# Altium PCB M26_M_V3.0.1.PcbDoc
Units mil, origin at the board's own origin, x right, y up, seen from the top; angles counter-clockwise.
Board outline 1968.5 x 1771.65 mil, 2 copper layers (Top Layer, Bottom Layer); 97 components, 84 nets, 345 pads, 100 vias.
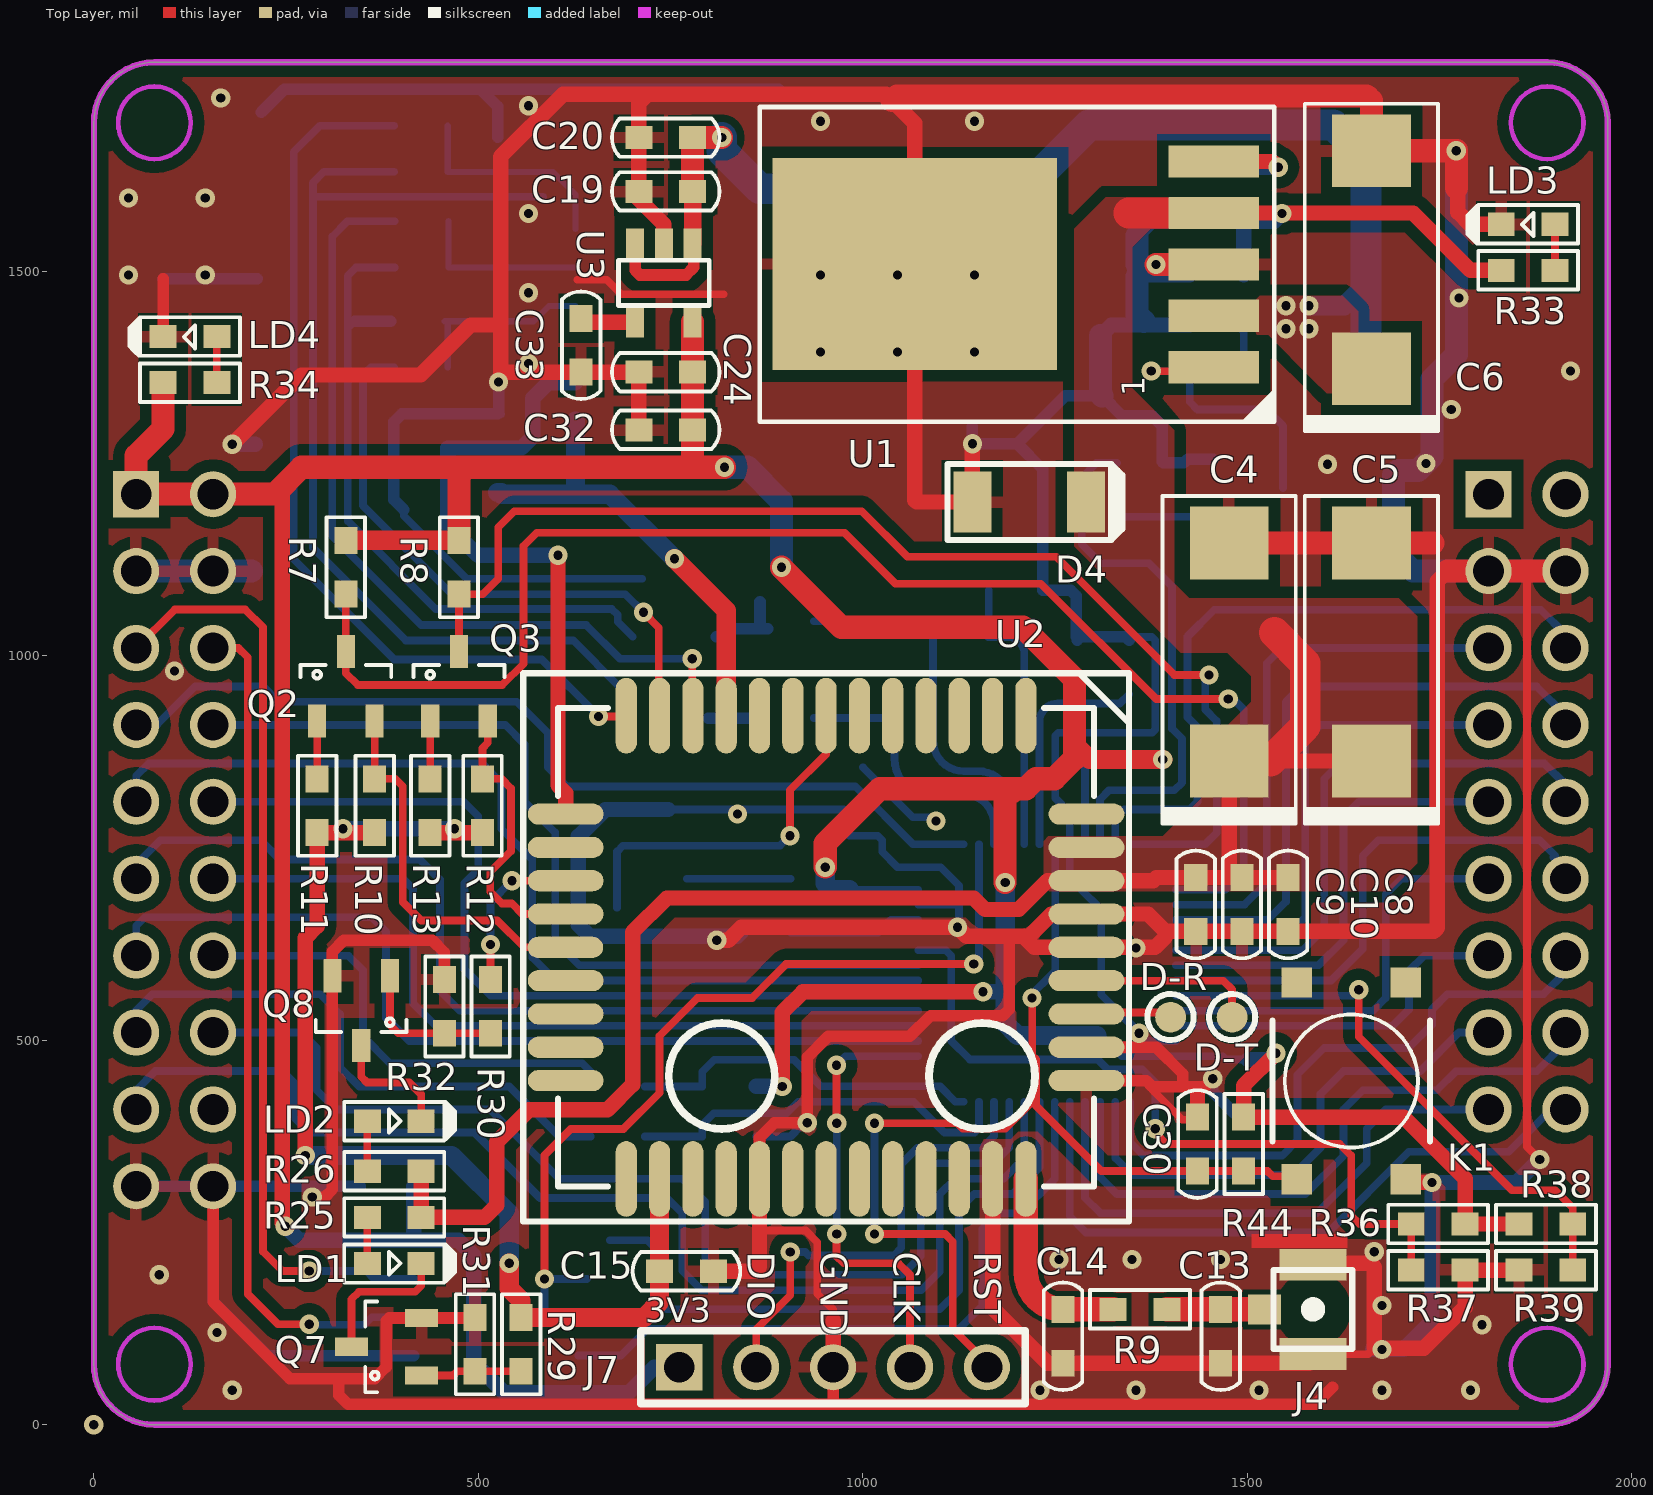
[diagram p0: Top Layer view]
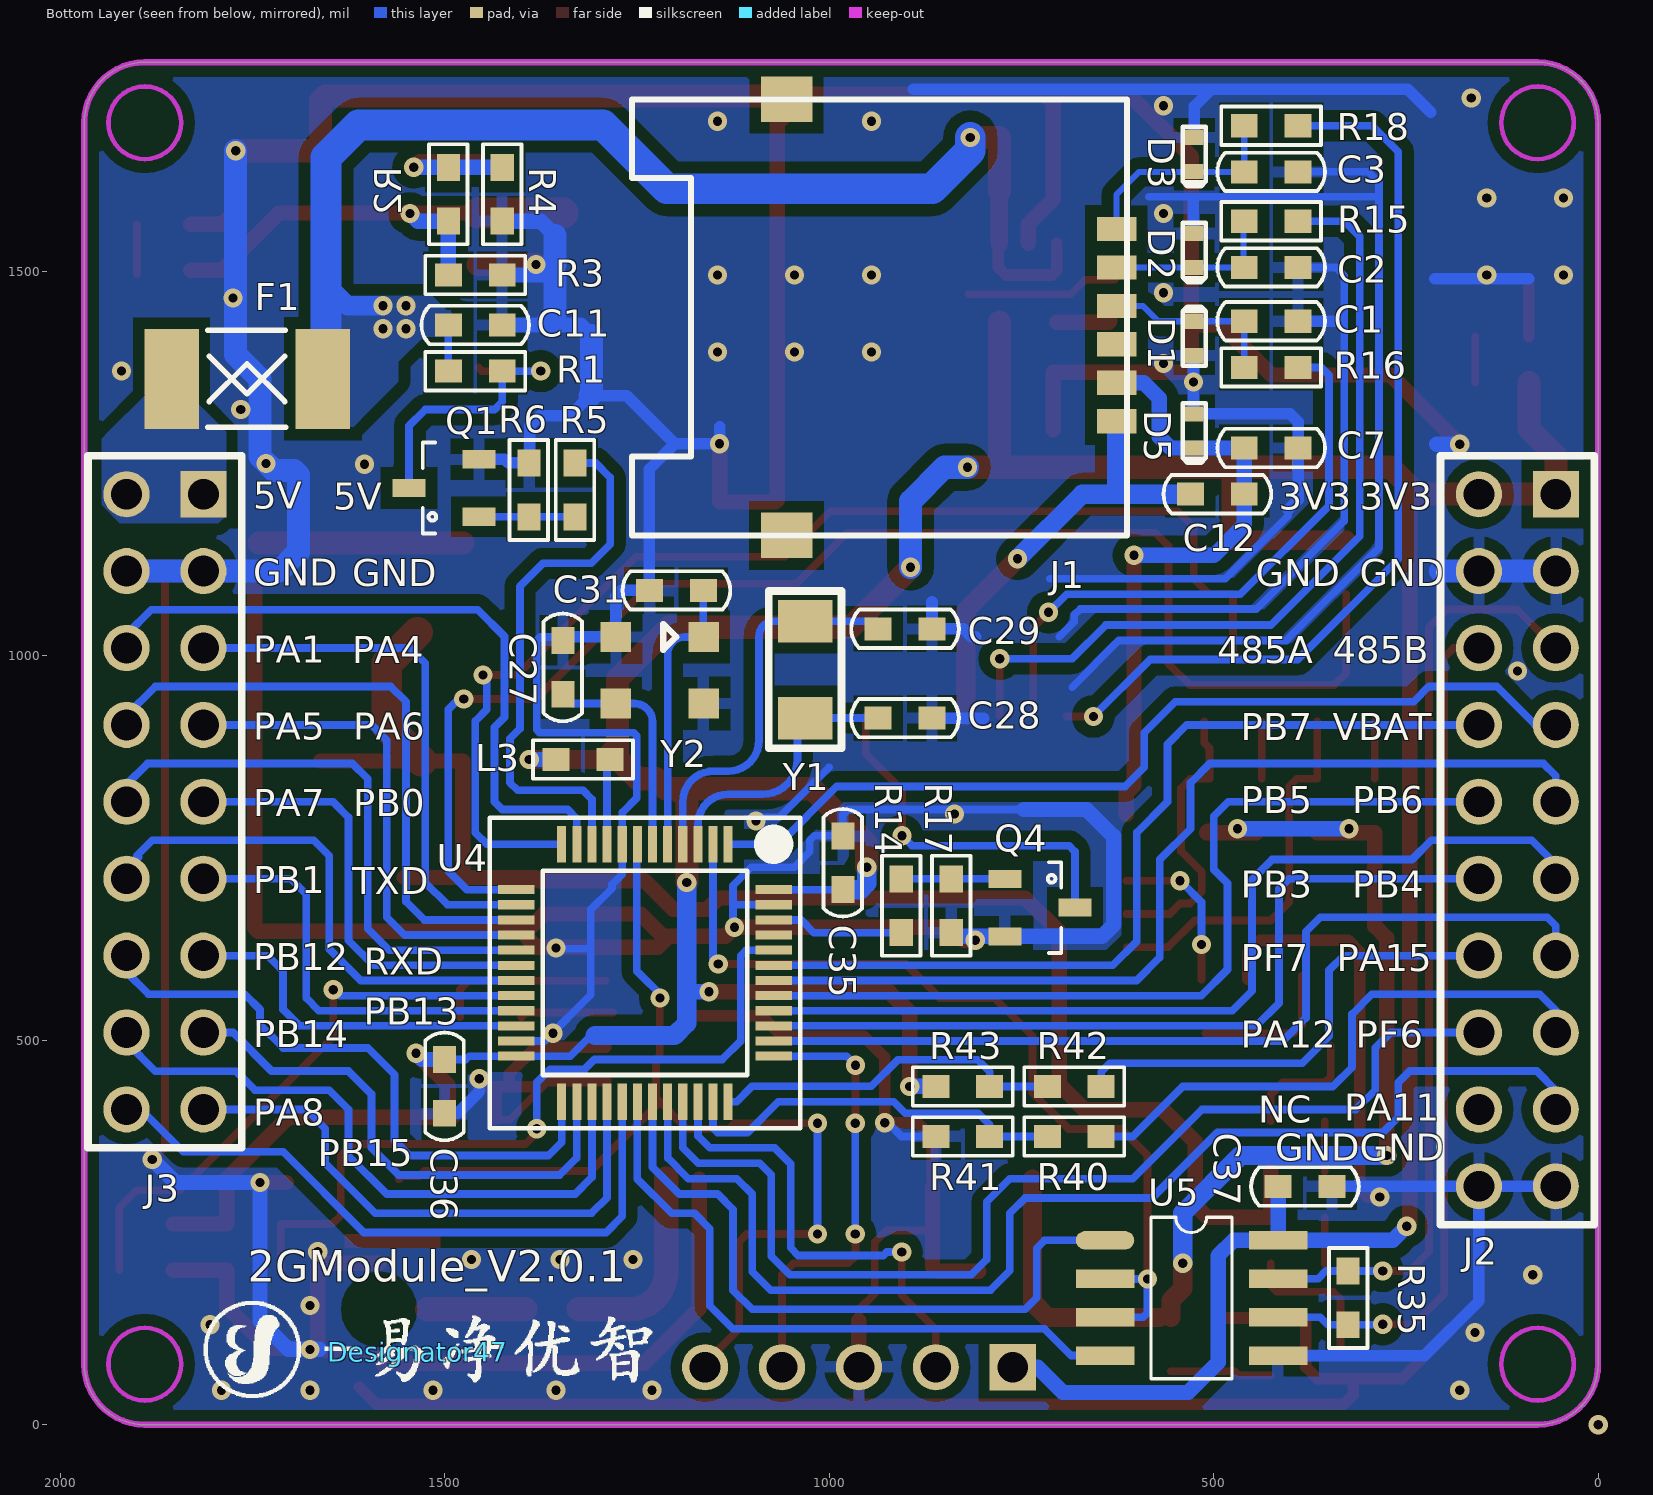
[diagram p1: Bottom Layer view, seen from below]

## Layer stack, top to bottom
Top Layer: signal copper 1.4
Dielectric: dielectric 12.6, FR-4, Dk 4.8
Bottom Layer: signal copper 1.4

## Board outline
0,78.74 ccw(c78.74,78.74) 78.74,0 1889.76,0 ccw(c1889.76,78.74) 1968.5,78.74 1968.5,1692.91 ccw(c1889.76,1692.91) 1889.76,1771.65 78.74,1771.65 ccw(c78.74,1692.91) 0,1692.91

## Design rules (kind name [scope] priority, off if disabled: settings)
Clearance [All] p1: gap=6
ComponentClearance [All] p1: gap=5 collisioncheckmode=0 verticalgap=10
PlaneClearance [All] p1: clearance=5.91
PlaneConnect [All] p1: planeconnectstyle=Relief reliefexpansion=20 reliefentries=4 reliefconductorwidth=20 reliefairgap=10
PolygonConnect [All] p1: connectstyle=Relief reliefconductorwidth=15 reliefentries=4 polygonreliefangle="90 Angle"
RoutingCorners [All] p1: cornerstyle=Round minsetback=393.7 maxsetback=393.7
RoutingVias [All] p1: holewidth=28 width=50 viastyle="Through Hole" minholewidth=12 minwidth=25 maxholewidth=50 maxwidth=50
SolderMaskExpansion [All] p1: expansion=4
TestPointUsage [All] p1: valid=0 allowmultiple=FALSE
Testpoint [All] p1: side=15 testpointundercomponent=TRUE minsize=40 maxsize=100 preferedsize=60 minholesize=0 maxholesize=40 preferedholesize=32 testpointgrid=1 style=1021 order=0-112345678
Width [All] p1: maxlimit=100 minlimit=8 preferedwidth=10 minimp=50.000000 maximp=50.000000 favimp=50.000000
15 further rules are at their usual default settings.

## Classes and differential pairs
component class U_03-2G: C1 C2 C3 C7 C12 C13 C14 C15 D1 D2 D3 D5 D-R D-T J1 J4 LD1 LD2 Q2 Q3 Q4 Q7 Q8 R7 R8 R9 R10 R11 R12 R13 R14 R15 R16 R17 R18 R25 R26 R29 R30 R31 R32 U2
component class U_01-POWER: C4 C5 C6 C8 C9 C10 C11 C19 C20 C24 C32 C33 D4 F1 LD3 LD4 Q1 R1 R2 R3 R4 R5 R6 R33 R34 U1 U3
component class U_02-MCU: C27 C28 C29 C30 C31 C35 C36 C37 J2 J3 J7 K1 L3 R35 R36 R37 R38 R39 R40 R41 R42 R43 R44 U4 U5 Y1 Y2

## Components (designator, comment, footprint, x,y, rotation, side; value= is the part's Value field where it differs from the comment)
C1 "33PF" 0603_C 390.16,1434.84 r0 bottom
C2 "33PF" 0603_C 390.16,1504.84 r0 bottom
C3 "33PF" 0603_C 390.16,1629.05 r0 bottom
C4 "220uF/16V" C_TAN_D 1476.18,1004.84 r90 top
C5 "220uF/16V" C_TAN_D 1661.18,1004.84 r90 top
C6 "220uF/16V" C_TAN_D 1661.18,1514.84 r90 top
C7 "33PF" 0603_C 390.16,1270.05 r0 bottom
C8 "0.1uF" 0603_C 1552.8,641.61 r90 top
C9 "33P" 0603_C 1432.8,641.61 r90 top
C10 "10P" 0603_C 1492.8,641.61 r90 top
C11 "0.1uF" 0603_C 1425,1430 r0 bottom
C12 "0.1uF" 0603_C 460.16,1210.05 r0 bottom
C13 "NC" 0603_C 1465.18,150 r270 top
C14 "NC" 0603_C 1260.18,150 r270 top
C15 "4.7uF" 0603_C 735.59,199.61 r0 top
C19 "1uF" 0603_C 778.58,1603.66 r180 top
C20 "0.1uF" 0603_C 778.58,1673.66 r180 top
C24 "1uF" 0603_C 778.58,1368.66 r180 top
C27 "Cap" 0603_C 1346.18,949.84 r90 bottom
C28 "Cap" 0603_C 936.18,918.86 r180 bottom
C29 "Cap" 0603_C 936.18,1034.84 r180 bottom
C30 "Cap" 0603_C 1435,400 r270 top
C31 "Cap" 0603_C 1163.55,1084.84 r0 bottom
C32 "0.1uF" 0603_C 778.58,1293.66 r180 top
C33 "10nF" 0603_C 633.58,1438.66 r270 top
C35 "Cap" 0603_C 982.13,695.79 r90 bottom
C36 "Cap" 0603_C 1500,475 r270 bottom
C37 "Cap" 0603_C 416.18,309.84 r180 bottom
D1 "ESD9M5.0ST5G" SOD-923 525.16,1434.84 r270 bottom
D2 "ESD9M5.0ST5G" SOD-923 525.16,1504.84 r90 bottom
D3 "ESD9M5.0ST5G" SOD-923 525.16,1629.62 r90 bottom
D4 "BZV55C4V3" SOD-80 1216.18,1199.84 r0 top
D5 "ESD9M5.0ST5G" SOD-923 525.16,1270.05 r90 bottom
D-R "" TP-40 1400,530 r90 top (schematic designator TP2)
D-T "" TP-40 1480,530 r0 top (schematic designator TP1)
Designator47 "Comment" PIC_AIRFACTORY-1500 1535,95 r180 bottom
F1 "Fuse 2A" 1812_F 1855,1360 r180 bottom
J1 "SIM_Card" MicroSIM-6 626.18,1304.84 r90 bottom
J2 "Header2X10" DIP20-2.54-2.54 55,1210 r270 bottom locked
J3 "HEADER2X9" DIP18-2.54-2.54 1813.5,1210 r270 bottom locked
J4 "CON2" RF-Z 1585.18,150 r270 top
J7 "XH2.54-5P" SIP5 761.18,74.84 r0 top
K1 "KEY" KEY_SMD5465 1706,575 r270 top
L3 "Inductor" 0603_R 1355,865 r180 bottom
LD1 "WHITE" LED_0603 355.59,209.61 r0 top
LD2 "WHITE" LED_0603 355.59,394.61 r0 top
LD3 "WHITE" LED_0603 1900,1561 r180 top
LD4 "WHITE" LED_0603 160,1415 r180 top
Q1 "2N3904" SOT23 1455.35,1180.59 r0 bottom
Q2 "BSS138" SOT23 290.32,914.84 r90 top
Q3 "BSS138" SOT23 437.32,914.84 r90 top
Q4 "2N3904" SOT23 771.18,709.84 r180 bottom
Q7 "2N3904" SOT23 425.83,64.01 r180 top
Q8 "2N3904" SOT23 385,583.82 r270 top
R1 "47K" 0603_R 1495,1370 r180 bottom
R2 "124K" 0603_R 1495,1635 r270 bottom
R3 "750R" 0603_R 1425,1495 r0 bottom
R4 "56K" 0603_R 1425,1635 r270 bottom
R5 "4.7K" 0603_R 1330.35,1250.59 r270 bottom
R6 "47K" 0603_R 1390.35,1180.59 r90 bottom
R7 "10K" 0603_R 327.72,1150 r270 top
R8 "10K" 0603_R 474.72,1150 r270 top
R9 "0R" 0603_r 1325.18,150 r0 top
R10 "10K" 0603_R 365.12,769.84 r90 top
R11 "10K" 0603_R 290.32,769.84 r90 top
R12 "10K" 0603_R 505.32,769.84 r90 top
R13 "10K" 0603_R 437.32,769.84 r90 top
R14 "4.7K" 0603_R 906.18,639.84 r90 bottom
R15 "22R" 0603_R 460.16,1564.84 r180 bottom
R16 "22R" 0603_R 460.16,1374.84 r180 bottom
R17 "47K" 0603_R 841.18,709.84 r270 bottom
R18 "22R" 0603_R 460.16,1689.06 r180 bottom
R25 "1K" 0603_R 425.59,269.61 r180 top
R26 "1K" 0603_R 425.59,329.61 r180 top
R29 "4.7K" 0603_R 555.59,139.61 r270 top
R30 "4.7K" 0603_R 515.83,579.01 r270 top
R31 "47K" 0603_R 495.59,69.61 r90 top
R32 "47K" 0603_R 455.83,509.01 r90 top
R33 "1K" 0603_R 1830,1501 r0 top
R34 "1K" 0603_R 90,1355 r0 top
R35 "100Ω" 0603_R 325,200 r270 bottom
R36 "Res3" 0603_R 1713,261 r0 top
R37 "Res3" 0603_R 1783,201 r180 top
R38 "Res3" 0603_R 1923,261 r180 top (schematic designator 38)
R39 "Res3" 0603_R 1853,201 r0 top
R40 "Res3" 0603_R 646.18,374.84 r0 bottom
R41 "Res3" 0603_R 791.18,374.84 r0 bottom
R42 "Res3" 0603_R 646.18,439.84 r0 bottom
R43 "Res3" 0603_R 791.18,439.84 r0 bottom
R44 "Res3" 0603_R 1495,330 r90 top
U1 "MIC29302" TO-263-5 1456.18,1374.84 r90 top
U2 "M26" M26 952.13,620.79 r270 top
U3 "LD3985M33R" SOT23-5L 741.18,1484.84 r180 top
U4 "STM32F103C8T6" LQFP48 1131.18,754.84 r0 bottom
U5 "MAX3485ESA" SO8 641.18,239.84 r180 bottom
Y1 "32.768K" 3215 1031.18,1044.84 r270 bottom
Y2 "8MHz" CRY_S3225 1226.18,984.84 r270 bottom

## Footprints (in the part's own frame and the unit in brackets; to place one, negate y for a bottom-side part, rotate by r counter-clockwise, add the part's x,y. Pads: shape width x height; smd on the part's side, far side on the other; paste and mask are expansions set on the pad)
0603_C [mil]
  rect 35x30 smd: 1(0,0) 2(70,0)
  silkscreen extent -35,-25 105,25, body extent 5,-15 65,15, height 39
0603_R [mil]
  rect 35x30 smd: 1(0,0) 2(70,0)
  silkscreen extent -30,-25 100,25, body extent 5,-15 65,15, height 39
0603_r [mil]
  rect 35x30 smd: 1(0,0) 2(70,0)
  silkscreen extent -30,-25 100,25, body extent 5,-15 65,15, height 39
1812_F [mm]
  rect 1.8x3.3 smd: 1(0,0) 2(5,0)
  silkscreen extent 1.2,-1.6 3.78,1.6
3215 [mm]
  rect 1.4x1.8 smd: 1(0,0) 2(3.2,0)
  silkscreen extent -1,-1.2 4.2,1.2
C_TAN_D [mm]
  rect 2.4x2.6 smd: 1(-3.6,0) 2(3.6,0)
  silkscreen extent -5.67,-2.2 5.15,2.21, body extent -3.67,-2.2 3.53,2.2, height 4.3
CRY_S3225 [mm]
  rect 1x1 smd: 1(-1.005,1.602) 2(-1.005,-1.298) 3(1.195,-1.298) 4(1.195,1.602)
  silkscreen extent -1.44,0.27 -0.57,0.7, body extent -1.61,-1.9 1.8,2.2, height 1
DIP18-2.54-2.54 [mil]
  rect 60x60 hole 40: 1(0,0)
  round 60 hole 40: 2(0,-100) 3(100,0) 4(100,-100) 5(200,0) 6(200,-100) 7(300,0) 8(300,-100) 9(400,0) 10(400,-100) 11(500,0) 12(500,-100) 13(600,0) 14(600,-100) 15(700,0) 16(700,-100) 17(800,0) 18(800,-100)
  silkscreen extent -50,-150 850,50
DIP20-2.54-2.54 [mil]
  rect 60x60 hole 40: 1(0,0)
  round 60 hole 40: 2(0,-100) 3(100,0) 4(100,-100) 5(200,0) 6(200,-100) 7(300,0) 8(300,-100) 9(400,0) 10(400,-100) 11(500,0) 12(500,-100) 13(600,0) 14(600,-100) 15(700,0) 16(700,-100) 17(800,0) 18(800,-100) 19(900,0) 20(900,-100)
  silkscreen extent -50,-150 950,50
KEY_SMD5465 [mm]
  rect 1x1 smd: 1(0,0) 2(0,-3.6) 3(6.5,0) 4(6.5,-3.6)
  silkscreen extent 1.05,-4.4 5.45,0.8, body extent -0.25,-4.06 6.73,0.46, height 1.5
LED_0603 [mil]
  rect 35x30 smd: A(0,0) K(70,0)
  silkscreen extent -30,-25 114,25
LQFP48 [mm]
  rect 0.3x1.2 smd: 1(0,0) 2(0.5,0) 3(1,0) 4(1.5,0) 5(2,0) 6(2.5,0) 7(3,0) 8(3.5,0) 9(4,0) 10(4.5,0) 11(5,0) 12(5.5,0) 25(5.5,8.5) 26(5,8.5) 27(4.5,8.5) 28(4,8.5) 29(3.5,8.5) 30(3,8.5) 31(2.5,8.5) 32(2,8.5) 33(1.5,8.5) 34(1,8.5) 35(0.5,8.5) 36(0,8.5)
  rect 1.2x0.3 smd: 13(7,1.5) 14(7,2) 15(7,2.5) 16(7,3) 17(7,3.5) 18(7,4) 19(7,4.5) 20(7,5) 21(7,5.5) 22(7,6) 23(7,6.5) 24(7,7) 37(-1.5,7) 38(-1.5,6.5) 39(-1.5,6) 40(-1.5,5.5) 41(-1.5,5) 42(-1.5,4.5) 43(-1.5,4) 44(-1.5,3.5) 45(-1.5,3) 46(-1.5,2.5) 47(-1.5,2) 48(-1.5,1.5)
  silkscreen extent -2.38,-0.88 7.88,9.38
M26 [mm]
  oval 2.5x0.7 smd: 1(-7.65,6.6) 2(-7.65,5.5) 3(-7.65,4.4) 4(-7.65,3.3) 5(-7.65,2.2) 6(-7.65,1.1) 7(-7.65,0) 8(-7.65,-1.1) 9(-7.65,-2.2) 10(-7.65,-3.3) 11(-7.65,-4.4) 12(-7.65,-5.5) 13(-7.65,-6.6) 23(7.65,-6.6) 24(7.65,-5.5) 25(7.65,-4.4) 26(7.65,-3.3) 27(7.65,-2.2) 28(7.65,-1.1) 29(7.65,0) 30(7.65,1.1) 31(7.65,2.2) 32(7.65,3.3) 33(7.65,4.4) 34(7.65,5.5) 35(7.65,6.6)
  oval 0.7x2.5 smd: 14(-4.4,-8.6) 15(-3.3,-8.6) 16(-2.2,-8.6) 17(-1.1,-8.6) 18(0,-8.611) 19(1.1,-8.6) 20(2.2,-8.6) 21(3.3,-8.6) 22(4.4,-8.6) 36(4.4,8.6) 37(3.3,8.6) 38(2.2,8.6) 39(1.1,8.6) 40(0,8.6) 41(-1.1,8.6) 42(-2.2,8.6) 43(-3.3,8.6) 44(-4.4,8.6)
  silkscreen extent -9.05,-10 9.05,10
MicroSIM-6 [mm]
  rect 1.5x1.7 smd: 0(-3.77,10.9) 0(10.63,10.9)
  rect 0.8x1.3 smd: 1(1.27,0) 2(3.81,0) 3(6.35,0) 5(0,0) 6(2.54,0) 7(5.08,0)
  silkscreen extent -3.77,-0.35 10.63,16
PIC_AIRFACTORY-1500 [mil]
  silkscreen extent -278,-60 305,65
RF-Z [mm]
  rect 1x1.1 smd: 1(0,-1.6)
  rect 1.05x2.2 smd: 2(-1.475,0) 2(1.475,0)
  silkscreen extent -1.3,-1.3 1.3,1.3
SIP5 [mil] "SIP5"
  rect 60x60 hole 40: 1(0,0)
  round 60 hole 40: 2(100,0) 3(200,0) 4(300,0) 5(400,0)
  silkscreen extent -50,-47 450,47
SO8 [mil]
  oval 76x24 smd: 1(0,0)
  rect 76x24 smd: 2(0,-50) 3(0,-100) 4(0,-150) 5(225,-150) 6(225,-100) 7(225,-50) 8(225,0)
  silkscreen extent 60,-180 165,30
SOD-80 [mm]
  rect 1.25x2 smd: 1(-1.875,0) 2(1.875,0)
  silkscreen extent -2.7,-1.25 3.08,1.25
SOD-923 [mm]
  rect 0.5x0.6 smd: 1(1.129,0) 2(0,0)
  silkscreen extent -0.48,-0.38 1.47,0.38
SOT23 [mm]
  rect 1.092x0.6 smd: 1(0,0) 2(0,-1.9) 3(2.308,-0.95)
  silkscreen extent 1.41,-2.45 1.85,0.55, body extent 0.45,-2.45 1.85,0.55, height 1.1
SOT23-5L [mm]
  rect 0.6x1 smd: 1(-0.95,-1.3) 2(0,-1.3) 3(0.95,-1.3) 4(0.95,1.3) 5(-0.95,1.3)
  silkscreen extent -1.5,-0.75 1.5,0.75
TO-263-5 [mm]
  rect 1.07x3 smd: 1(0,0) 2(1.7,0) 3(3.4,0) 4(5.1,0) 5(6.8,0)
  rect 7x9.4 smd: 6(3.41,9.878)
  silkscreen extent -1.8,-2 8.6,15, body extent 0,0 6.8,12.6, height 4.5
TP-40 [mil]
  round 40 smd: 1(0,0)
  silkscreen extent -30,-30 30,30

## Part data
C1 C2 C3 C7 C12 C13 C14 C15: library part CAP, "CAP"
C4 C5 C6: library part ECAP, "E-CAP"
C8 C9 C10 C11: library part "Cap Semi", "Capacitor"
C19 C20 C24 C32 C33: library part "Cap Semi_1", "Capacitor"
C27 C28 C29 C30 C31 C35 C36 C37: "Capacitor"
D1 D2 D3 D4 D5: library part "DIODE SCHOTTKY"
D-R D-T: library part "T POINT A"
F1: library part "Fuse 1", "Fuse"
J7: library part "Header 5H", "Header, 5-Pin, Right Angle"
LD1 LD2 LD3 LD4: library part LED, "LED"
Q1 Q4 Q7 Q8: library part NPN
Q2 Q3: library part "N-Channel Enhancement MOSFET", "N-Channel Enhancement MOSFET"
R1 R2 R4 R15 R16 R18: library part R0.25W, "RESISTOR"
R3 R5 R6 R14 R17 R25 R26 R29 R30 R31 R32 R33 R34 R35: library part RES1
R7 R8 R9 R10 R11 R12 R13: library part Res3_3, "Resistor"
R36 R37 R38 R39 R40 R41 R42 R43 R44: "Resistor"
U3: library part LD3985MSSR
U5: library part MAX485
Y1: library part XTAL, "Crystal Oscillator"
Y2: library part CRYSTAL_S4_1, "CRYSTAL_S4_PASSIVE"

## Via types
v1: diameter 25, hole 12, Top Layer to Bottom Layer, tented both sides, 100 vias

## Nets (pads, with @x,y where several pads share a name; then routed paths per layer and width w, separated by ;. In a path a pad name is that pad's centre, name@x,y a point inside that pad or via, vN(x,y) a via of type N, cw(c..) or ccw(c..) an arc to the next point about the centre after c; other vN are vias at no path point)
4G_RESET: U4.45
485_A: J2.6 R35.2 U5.6 | length 1114
  Top Layer w10: J2.6 188,1010 200,998 200,170 239.41,130.59 v1(280,130.59)
  Bottom Layer w10: v1@280.59,130 351.76,130 361.61,139.84 U5.6
485_B: J2.5 R35.1 U5.7 | length 1224
  Top Layer w10: J2.5@61.02,1010 J2.5 105,1060 197,1060 220,1037 220,225 245,200 v1(280,200)
  Bottom Layer w10: v1(280,200) 353.94,200 364.1,189.84 U5.7
485_CTRL: U4.2 U5.2 U5.3 | length 1180.9
  Top Layer w10: v1(585.94,189.61) 585.94,350.61 619.94,384.61 688.59,384.61 735.59,431.61 735.59,505.59 785,555 856,555 900,599 v1(1144,599)
  Bottom Layer w10: U5.3 591.71,139.84 585.94,145.61 v1(585.94,189.61) 640.94,189.61 U5.2 ; v1(1144,599) 1150.87,605.87 U4.2
+3.3V: C24.1 C32.1 C35.1 C36.1 C37.1 J2.1 J2.2 J7.1 L3.1 R7.1 R8.1 R34.1 R36.2 R38.2 R43.2 R44.2 U3.5 U4.24 U4.48 U5.8 | length 6227.1
  Top Layer w20: 245,1220 245,262 v1(249,258) ; J7.1@761.18,68.82 J7.1@761.18,79.84 ; v1(895,440) 895,536 922,563 v1(1156,563) ; R44.2@1490,400 1703,400 1783,320 R36.2 R38.2 ; R44.2 1495,441 v1(1537,483)
  Top Layer w25: R7.1 R8.1 ; 1275,885 1295,865 v1(1390,865)
  Top Layer w30: R34.1 90,1295 55,1260 J2.1 235,1210 270,1245 v1(820,1245) ; R8.1@475,1156 475,1235 485,1245 ; 770,1245 778.58,1253.58 ; 777.17,1255 778.58,1253.58 ; U3.5 778.58,1253.58 ; v1(894,1115) 972,1037 1208,1037 1275,970 1275,866 1249,840 1225,840 1211.99,826.99 1021.99,826.99 951,756 v1(951,725) ; v1(1185,705) 1185,816.99 1195,826.99 ; 1192.99,821.99 1197.99,826.99
  Bottom Layer w10: C35.1 U4.48 ; 1304,506 1310,506 1336.75,479.25 1467.99,479.25 1472.24,475 C36.1
  Bottom Layer w20: v1(249,258) 267.16,239.84 474.16,239.84 494,220 494,81 533,42 696,42 728.84,74.84 J7.1 ; U5.8 C37.1 ; J7.1@761.18,69.84 J7.1@771.18,69.84 ; R43.2@861.34,439.84 R43.2 861.34,440 v1(895,440) ; v1(1156,563) 1182,563 ; L3.1 v1(1390,865) ; C36.1 1529,475 v1(1537,483)
  Bottom Layer w25: v1(951,725) 951,704 959.21,695.79 C35.1 ; v1(1185,705) 1185,522 1201,506 1304,506
  Bottom Layer w30: v1(820,1245) 850,1245 894,1201 v1(894,1115)
+4V: C4.1 C5.1 C8.2 C9.2 C10.2 D4.2 R2.2 R3.2 R25.1 R26.1 R33.1 U1.4 U2.42 U2.43 | length 2715.7
  Top Layer w20: R26.1 R25.1 508,269.61 524,285.61 524,368 565.61,409.61 667.94,409.61 700.59,442.25 700.59,640.59 745,685 1144,685 1159,670 1202.6,670 1240,707.4 1377.32,707.4 1381.53,711.61 C9.2 C8.2 ; U1.4 1715.37,1575.63 1790,1501 R33.1 ; 1476.18,721.06 C4.1 C5.1
  Top Layer w40: 1345.63,1575.63 U1.4 ; 1530,863.11 1575,908.11 1575,990 1535,1030
  Bottom Layer w20: R3.2 R2.2 1535,1565 v1(1545,1575)
+5V: C6.1 C11.2 C19.1 C20.1 F1.2 R1.1 U1.2 U3.1 U3.3 | length 1673.3
  Top Layer w15: U3.3 703.78,1501.22 710,1495 770,1495 780,1505 U3.1@780,1525
  Top Layer w23: U3.1 C19.1
  Top Layer w30: C19.1 C20.1 v1(816.34,1673.66)
  Bottom Layer w10: C11.2@1489,1427 1495,1421 R1.1
  Bottom Layer w15: v1(1580,1455) v1@1585,1460
  Bottom Layer w25: v1(1580,1455) 1626,1455 1654,1483
  Bottom Layer w30: v1@816.34,1672.66 v1(816.34,1673.66) ; F1.2@1654,1368 F1.2@1654,1399
  Bottom Layer w40: v1(816.34,1673.66) 816.34,1656.66 866,1607 1211,1607 1294,1690 1612,1690 1654,1648 F1.2@1654,1399
  other v1: 1550,1425 1580,1425 1550,1455
BOOT0: R36.1 R37.2 U4.44 | length 997.1
  Top Layer w10: v1(1380,385) 1380,380 1395,365 1620,365 1635,350 1635,272 1646,261 R36.1 R37.2
  Bottom Layer w10: U4.44 1107.95,617.05 1115,610 1115,499 1139,475 1305,475 1318,462 1363,462 1380,445 v1(1380,385)
BOOT1: R38.1 R39.2 U4.20 | length 753.8
  Top Layer w10: v1(1644.58,565.66) 1644.58,504.42 1844,305 1900,305 1923,282 R39.2
  Bottom Layer w10: U4.20 1636.91,557.99 v1(1644.58,565.66)
DBG_RXD: D-R.1 U2.38 | length 121.5
  Top Layer w10: U2.38@1281,536 1394,536 D-R.1
DBG_TXD: D-T.1 U2.39 | length 230
  Top Layer w10: U2.39 1468.52,577.48 1480,566 D-T.1
GND: C1.1 C2.1 C3.1 C4.2 C5.2 C6.2 C7.1 C8.1 C9.1 C10.1 C11.1 C13.2 C14.2 C15.2 C19.2 C20.2 C24.2 C27.2 C28.2 C29.2 C30.1 C31.2 C32.2 C33.2 C35.2 C36.2 C37.2 D1.1 D2.1 D3.1 D4.1 D5.1 J2.3 J2.4 J2.19 J2.20 J3.3 J3.4 J4.2 J7.3 K1.3 LD3.K LD4.K Q1.2 Q4.2 Q7.2 Q8.2 R3.1 R4.2 R6.2 R17.2 R31.2 R32.2 R37.1 R39.1 R41.2 U1.3 U1.6 U2.27 U2.34 U2.36 U2.37 U2.40 U2.41 U3.2 U4.8 U4.23 U4.47 U5.5 Y2.2 Y2.4 | length 21274.1
  Top Layer w10: 629,1489 667,1489 686,1470 819,1470 ; 865.51,244.61 873.51,252.61 925.59,252.61 940.77,237.43 940.77,170.23 961.18,149.82 961.18,135 ; 1376.39,435.6 1415.48,396.52 C30.1@1435.01,396.52 ; J4.2@1580.18,91.77 1656.77,91.77 v1@1665,100 ; 1863.5,1105 1863.5,361.5 v1(1880,345)
  Top Layer w15: LD4.K 90,1490 ; J2.20 155,160 255,60 365,60 380,75 380,135 383.82,138.82 494.8,138.82 R31.2 ; v1(284,296) 300.2,296 310.2,306 310.2,615.2 325,630 440,630 455.83,614.17 R32.2 ; 318.58,60 318.58,38.66 330.58,26.66 1588.58,26.66 1610.58,48.66 ; U2.27 865.51,373.12 885,392.61 v1(927.59,392.61) 927.59,477.59 955,505 1061,505 1088,532 1182,532 1190,540 1190,630 1195,635 ; 958.58,26.66 961.18,29.26 J7.3 ; U2.36 1368.44,447.56 1376.39,439.61 1444.61,439.61 v1(1455,450) ; U2.37 1381.38,490.87 1415.59,456.65 1415.59,439.61 ; C9.1 C8.1
  Top Layer w20: v1(180,1275) 270,1365 425,1365 490,1430 529,1430 ; v1@529,1365 529,1649 610,1730 1030,1730 1067.3,1692.7 1067.3,1202.14 1069.61,1199.84 D4.1 v1(1142.36,1275.64) ; 529,1368.66 C24.2 C32.2 ; 720,1730 708.58,1718.58 708.58,1593.42 741.18,1560.82 U3.2 ; C15.2 859.59,199.61 865.51,205.53 U2.27@865.51,309.49 ; v1(810,630) 825,630 842,647 v1(1123,647) 1135,635 1208.79,635 1223,620.79 1379.79,620.79 1393.39,634.39 ; J7.3 961.18,135 ; J7.3@971.18,69.84 J7.3@971.18,79.84 ; U2.34 1168.66,151.53 1240.35,79.84 C14.2@1255,79.84 ; 1218,637 1245.09,664.09 1370.91,664.09 1393.39,641.61 1742.61,641.61 1747,646 1747,1097 1760,1110 ; C14.2@1260.18,79.84 J4.2@1580.18,79.84 ; C30.1 1435,430 ; J4.2@1585,210 1660,210 1665,205 v1@1665,100 ; v1@1680.59,99.61 1729.61,99.61 1783,153 R37.1 R39.1 ; K1.3@1706,315 v1(1740,315) ; 1773.58,1599.66 1773.58,1576.66 1789.24,1561 LD3.K
  Top Layer w30: 1038.15,1721.85 1044.3,1728 1655,1728 1661.18,1721.82 C6.2 v1(1771.57,1656.57) 1771.57,1608.43 ; v1(1381.18,1508.7) U1.3 ; C4.2 1741.43,1146.57 ; 1760,1110 J3.4
  Bottom Layer w10: 286.61,1596.61 584.39,1596.61 ; 330,1425.84 339,1434.84 ; C3.1 299.06,1629.06 285,1615 285,1140.43 405.59,1019.84 623.16,1019.84 684,959 ; C2.1@391.18,1504.84 340.95,1504.84 330,1493.9 330,1175.2 444.59,1060.61 673.39,1060.61 681.03,1052.97 681.03,1044.17 700.59,1024.61 ; 403,1190 403,1182 485,1100 713,1100 ; 519.77,1596.61 526.18,1590.2 ; D5.1 524.72,1314.05 D5.1@529.72,1314.05 ; 747,800 975,800 982.13,792.87 C35.2 1019.21,765.79 1025,760 1025,745 1045,725 1101,725 1125,701 1125,655 v1@1117,647 ; R41.2 905.83,374.84 v1@919.59,388.61 ; 1000,855 1065,790 v1@1100,790 ; U4.47 1121.1,676.1 1125,680 ; 1310,618.98 v1@1353.98,618.98 ; C27.2@1341.61,1024.42 1375.58,1024.42 1380,1020 1380,904 1376,900 1254,900 1250,896 1250,815 1268.98,796.02 1268.98,716.02 1282.18,702.82 1282.18,697.82 1310,670 1310,558.94 1370,498.94 U4.23 ; v1@1360,508.94 v1@1360,509
  Bottom Layer w15: J2.19 J2.20 ; 90,1490 212.59,1490 ; 217.59,1706.61 247.59,1736.61 890.39,1736.61 ; 339,1434.84 C1.1@386.18,1434.84 ; C37.2 155.16,309.84 J2.20 ; 403,1190 390.16,1202.84 390.16,1304.06 400.59,1314.49 D5.1 ; U5.5 226.1,89.84 155,160.94 J2.20 ; 502.73,1736.61 525.16,1714.17 D3.1 ; D5.1@526.18,1315.51 D1.1@526.18,1390.41 ; D2.1@526.18,1549.28 526.18,1590.2 ; 798.86,918.86 C28.2 ; 809,1024.61 815,1024.61 825.24,1034.84 C29.2@876.18,1034.84 ; C29.2@865,1034.84 866.18,1036.02 866.18,1070 ; 1142.36,1297.64 v1(1142.36,1275.64) 1200.64,1275.64 ; Y2.2@1278.55,1020 Y2.2@1278.71,1019.84 ; C27.2 1341.61,1024.42 Y2.2 1277.3,1077.7 1270,1085 1233.71,1085 C31.2 1233.55,1242.72 1200.64,1275.64 ; Q1.2 1422.16,1255.39 1417.35,1250.59 R6.2 1389,1251.94 1389,1299 1376,1312 1337,1312 1311,1338 1263,1338 1200.64,1275.64 ; v1@1460,450 v1(1455,450) 1455,433 1483,405 C36.2 C36.2@1500,410
  Bottom Layer w20: v1(180,1275) 210,1275 ; 747,800 665,800 630,765 630,650.04 645,635.04 836.38,635.04 R17.2 ; 1309,1416.05 1322.95,1430 C11.1 ; 1356.18,1493.05 1358.13,1495 R3.1 ; 1356.18,1546.18 1375,1565 R4.2 ; v1@1663,98 1703,98 1740,135 v1(1740,315) 1850,315 v1(1880,345)
  Bottom Layer w30: J2.3 205,1110 ; 1309,1416.05 1309,1340 1311,1338 ; 1356.18,1493.05 1356.18,1443.82 1365.16,1434.84 ; 1356.18,1508.7 1356.18,1546.18 ; v1(1771.57,1656.57) 1771.57,1391.57 1740,1360 1740,1259 1722,1241 1696,1241 1690,1235 1690,1135 1715,1110 J3.4
  other v1: 180,45 1230.18,45 1355,45 1515,45 1675,45 1790,45 1675,98 160,120 1805,130 1675,155 85,195 1255,215 1350,215 1465,215 1665,225 1359,509 1355,620 1095,785 837,794 105,980 1604,1249 1732,1250 1765,1320 526.18,1356 1920,1370 565,1380 945,1395 1045,1395 1145,1395 1775,1465 565,1472 45,1495 145,1495 945,1495 1045,1495 1145,1495 565,1575 45,1595 145,1595 945,1695 1145,1695 565,1715 165,1725
M26_RXD: Q3.2 R12.2 U2.17 | length 371.8
  Top Layer w10: R12.2 505.32,879.84 512.12,886.64 Q3.2 ; R12.2@509.32,839.84 530.16,839.84 542.32,827.68 542.32,745.84 515.32,718.84 515.32,693.14 530.59,677.87 543.29,677.87 557.07,664.09 U2.17
M26_TXD: Q2.2 R10.2 U2.18 | length 501.8
  Top Layer w10: Q2.2 R10.2 391.87,839.84 401.72,829.98 401.72,679.71 425.72,655.71 524.49,655.71 559.41,620.79 U2.18
NetC13_1: C13.1 J4.1 R9.2 | length 127
  Top Layer w32: R9.2 J4.1
NetC14_1: C14.1 R9.1 U2.35 | length 262.1
  Top Layer w32: U2.35 1211.97,198.21 ccw(c1260.18,198.21) C14.1 R9.1
NetC33_1: C33.1 U3.4 | length 69.3
  Top Layer w20: C33.1@635,1435 636.34,1433.66 U3.4
NetL3_2: L3.2 U4.9 | length 111.7
  Bottom Layer w10: L3.2 1288.66,861.34 U4.9
NetLD1_A: LD1.A R25.2 | length 60
  Top Layer w10: LD1.A R25.2
NetLD1_K: LD1.K Q7.3 | length 188.5
  Top Layer w10: Q7.3 334.96,162.96 344.88,172.88 417.88,172.88 425.59,180.59 LD1.K
NetLD2_A: LD2.A R26.2 | length 65
  Top Layer w10: R26.2 LD2.A
NetLD2_K: LD2.K Q8.3 | length 162.8
  Top Layer w10: Q8.3 347.6,452.6 355.2,445 410,445 425.59,429.41 LD2.K
NetLD3_A: LD3.A R33.2 | length 65
  Top Layer w10: R33.2@1900,1496 LD3.A
NetLD4_A: LD4.A R34.2 | length 60
  Top Layer w10: R34.2 LD4.A
NETLIGHT: R30.1 U2.16 | length 213.7
  Top Layer w10: v1@515.59,624.61 v1(515.83,624.37) R30.1 ; v1(543.54,707.4) U2.16
  Bottom Layer w10: v1@510.83,624.37 v1@513.33,626.87 ; v1(515.83,624.37) 515.83,679.68 v1(543.54,707.4)
NetQ1_1: Q1.1 R5.2 R6.1 | length 125
  Bottom Layer w10: R5.2 R6.1 Q1.1
NetQ1_3: Q1.3 R1.2 U1.1 | length 388.1
  Top Layer w10: v1(1375,1370) 1451.34,1370 U1.1
  Bottom Layer w10: v1(1375,1370) R1.2 1425,1330 1435,1320 1525,1320 1546.22,1298.78 Q1.3
NetQ2_1: Q2.1 R11.2 | length 75
  Top Layer w10: R11.2 Q2.1
NetQ3_1: Q3.1 R13.2 | length 75
  Top Layer w10: R13.2 Q3.1
NetQ4_1: Q4.1 R14.2 R17.1 | length 135
  Bottom Layer w10: Q4.1 R14.2
NetQ4_3: Q4.3 U2.7 | length 481.8
  Top Layer w10: v1(905.13,765.79) 905.13,825.13 952.13,872.13 U2.7
  Bottom Layer w10: Q4.3 680.32,745.32 687.79,752.79 892.13,752.79 v1(905.13,765.79)
NetQ7_1: Q7.1 R29.2 R31.1 | length 132.1
  Top Layer w10: Q7.1 467,64.02 472.59,69.61 R29.2
NetQ8_1: Q8.1 R30.2 R32.1 | length 194.2
  Top Layer w10: Q8.1 385,520 395.98,509.02 R30.2@510.83,509.02
NetR2_1: R2.1 R4.1 U1.5 | length 202
  Top Layer w20: U1.5 1532.44,1642.56 v1(1540,1635)
  Bottom Layer w20: R4.1 v1(1540,1635)
NetR15_2: R15.2 U2.11 | length 1087.4
  Top Layer w10: v1(777.95,996.02) 777.95,922.91 U2.11
  Bottom Layer w10: R15.2@391.18,1564.84 329.84,1564.84 310,1545 310,1155.43 425.59,1039.84 640.35,1039.84 684.17,996.02 v1(777.95,996.02)
NetR16_2: R16.2 U2.12 | length 779.5
  Top Layer w10: v1(714.65,1056.38) 734.65,1036.38 U2.12@734.65,921.97
  Bottom Layer w10: R16.2 360,1374.84 350,1364.84 350,1195.2 465.2,1080 691.02,1080 v1(714.65,1056.38) ; v1@715.13,1056.87 v1@715.62,1056.38
NetR18_2: R18.2 U2.13 | length 1189.7
  Top Layer w10: v1(656.34,921.02) U2.13@691.34,921.02
  Bottom Layer w10: R18.2 294.06,1689.06 260,1655 260,1125.59 390.59,995 582.36,995 v1(656.34,921.02)
NRST: C30.2 J7.5 K1.4 R44.1 U4.7 | length 1376.6
  Top Layer w10: v1(1015,248) 1107,248 1117,238 1117,125 1161.18,80.82 J7.5 ; v1(1015,392) 1123,392 1130,385 1185,385 1225,425 ; v1(1220,555) 1220,480 1225,475 1225,415 1310,330 1526,330 1533,323 1555.36,323 K1.4@1559.27,319.09
  Bottom Layer w10: v1(1015,248) v1(1015,392) ; v1@1215,555 1250,590 U4.7@1250,740
OSC32_IN: C28.1 U4.3 Y1.2 | length 342.1
  Bottom Layer w10: C28.1 Y1.2 ; Y1.2@1041.18,908.86 1041.18,865 ccw(c1086.34,865) 1086.34,819.84 1131.18,819.84 cw(c1131.18,780.47) 1170.55,780.47 U4.3
OSC32_OUT: C29.1 U4.4 Y1.1 | length 501.2
  Bottom Layer w10: C29.1@936.18,1044.84 1071.18,1044.84 cw(c1071.18,1024.84) 1091.18,1024.84 1091.18,889.84 ccw(c1131.18,889.84) 1131.18,849.84 1150.39,849.84 cw(c1150.39,810) 1190.24,810 U4.4
OSC_IN: C31.1 U4.5 Y2.1 | length 365.8
  Bottom Layer w10: Y2.1 1187.61,1024.42 cw(c1187.61,1002.1) 1209.92,1002.1 U4.5 ; Y2.1@1163.55,1025.84 C31.1
OSC_OUT: C27.1 U4.6 Y2.3 | length 294.4
  Bottom Layer w10: U4.6 1229.61,914.19 cw(c1253.22,914.19) 1253.22,937.8 1334.14,937.8 C27.1
PA1: J3.6 U4.11 | length 906.5
  Bottom Layer w10: U4.11 1328.03,788.03 1340,800 1425,800 1435,810 1435,907 1422,920 1422,1025 1456.84,1059.84 1881.18,1059.84 1913.5,1027.52 J3.6
PA4: J3.5 U4.14 | length 712
  Bottom Layer w10: U4.14 1496.1,676.1 1525,705 1525,990 1545,1010 J3.5
PA5: J3.8 U4.15 | length 812.6
  Bottom Layer w10: U4.15 1526.42,656.42 1550,680 1550,939.84 1570,959.84 1876.18,959.84 1913.5,922.52 J3.8
PA6: J3.7 U4.16 | length 654.7
  Bottom Layer w10: U4.16 1551.73,636.73 1575,660 1575,890 1595,910 J3.7
PA7: J3.10 U4.17 | length 755.4
  Bottom Layer w10: U4.17 1572.05,617.05 1600,645 1600,840 1619.84,859.84 1886.18,859.84 1913.5,832.52 J3.10
PA8: J3.18 U4.29 | length 868.7
  Bottom Layer w10: U4.29 1268.98,271.02 1290,250 1605,250 1709.84,354.84 1839.84,354.84 1895,410 J3.18
PA11: J2.17 U4.32 | length 1557.1
  Bottom Layer w10: J2.17@55,435 80,460 245,460 260,445 260,400 280,380 495,380 580.16,294.84 745.16,294.84 765,275 765,200.2 790.2,175 1075.98,175 1100,199.02 1100,300 1120,320 1183,320 1209.92,346.92 U4.32
PA12: J2.16 U4.33 | length 1432.4
  Bottom Layer w10: J2.16 270,510 290,490 290,435 315,410 515,410 605,320 765,320 795,290 795,215 815,195 1050.98,195 1075,219.02 1075,325 1090,340 1170,340 1190.24,360.24 U4.33
PA15: J2.13 U4.38 | length 1192.7
  Bottom Layer w10: J2.13 55,648.66 66.18,659.84 361.16,659.84 380,641 380,529 410.06,498.94 U4.38
PB0: J3.9 U4.18 | length 588.5
  Bottom Layer w10: U4.18 1592.36,597.36 1625,630 1625,790 1645,810 J3.9
PB1: J3.12 U4.19 | length 682.5
  Bottom Layer w10: U4.19 1609.02,577.68 1650,618.66 1650,740 1670,760 1880,760 1900,740 ; 1898.01,738.01 1913.5,722.52 J3.12
PB3: J2.12 U4.39 | length 1083.7
  Bottom Layer w10: J2.12 402,710 415,697 415,548 444.38,518.62 U4.39
PB4: J2.11 U4.40 | length 1225.2
  Bottom Layer w10: J2.11 55,728.66 86.18,759.84 217.16,759.84 242,735 424,735 450,709 450,564.31 476,538.31 U4.40
PB5: J2.10 U4.41 | length 1163.5
  Bottom Layer w10: J2.10 481,810 500,791 500,722 482,704 482,592 516.01,557.99 U4.41
PB6: J2.9 U4.42 | length 1284.1
  Bottom Layer w10: J2.9 55,843.66 71.18,859.84 505.16,859.84 530,835 530,775 570,735 570,607.68 600,577.68 U4.42
PB7: J2.8 U4.43 | length 1173.5
  Bottom Layer w10: J2.8 535,910 560,885 560,810 600,770 600,628.36 631,597.36 U4.43
PB12: J3.14 U4.25 | length 807.7
  Bottom Layer w10: U4.25 1347.72,367.28 1365,350 1545,350 1565,370 1565,455 1600,490 1710,490 1740,520 1740,540 1759.84,559.84 1884.84,559.84 1913.5,588.5 J3.14
PB13: J3.15 U4.26 | length 685.6
  Bottom Layer w10: U4.26 1328.03,346.97 1350.16,324.84 1559.84,324.84 1595,360 1595,430 1625,460 1725,460 1775,510 J3.15
PB14: J3.16 U4.27 | length 842.3
  Bottom Layer w10: U4.27 1308.35,321.65 1330,300 1575,300 1625,350 1625,410 1650,435 1746.34,435 1771.18,459.84 1876.18,459.84 1913.5,497.16 J3.16
PB15: J3.17 U4.28 | length 740.4
  Bottom Layer w10: U4.28 1288.66,295.34 1309,275 1590,275 1655,340 1655,385 1680,410 J3.17
PF6: J2.15 R40.1 | length 754.6
  Bottom Layer w10: J2.15@46.18,504.84 46.18,529.84 76.18,559.84 294.16,559.84 320,534 320,464.84 345,439.84 540,439.84 605,374.84 R40.1
PF7: J2.14 R42.1 | length 623.2
  Bottom Layer w10: J2.14 331,610 350,591 350,505 385,470 635,470 646.18,458.82 R42.1
PIN35: R40.2 R41.1 U4.35 | length 515.7
  Bottom Layer w10: R40.2 R41.1 791.18,390.2 805.98,405 901,405 916,420 1066,420 1106,380 1145,380 1150.87,385.87 U4.35
PIN36: R42.2 R43.1 U4.36 | length 463.2
  Bottom Layer w10: R42.2 R43.1 791.18,459.01 806.77,474.61 910.39,474.61 945,440 1100.2,440 1120,420.2 U4.36
PWRKEY: R14.1 U4.46 | length 172.8
  Bottom Layer w10: R14.1 1019.84,639.84 1036.42,656.42 U4.46
PWRON: R5.1 U4.10 | length 715.4
  Bottom Layer w10: U4.10 1308.35,813.35 1320,825 1405,825 1415,835 1415,892 1402,905 1402,1090 1372,1120 1309.35,1120 1284.35,1145 1284.35,1231.59 1303.35,1250.59 R5.1
RXD2_MCU: U4.31 U5.1 | length 856.9
  Bottom Layer w10: U5.1@671.18,239.84 719.84,239.84 730,229.68 730,165 745,150 1100,150 1125,175 1125,280 1145,300 1194.61,300 1229.61,335 U4.31
RXD3_MCU: J3.13 U4.22 | length 470.4
  Bottom Layer w10: U4.22 1688.62,518.62 1710,540 1710,590 1730,610 J3.13@1810,610
RXD_MCU: Q2.3 R7.2 U4.13 | length 1851.5
  Top Layer w10: R7.2 327.72,977.28 343,962 531.02,962 558.72,989.71 558.72,1142.71 576.02,1160 976,1160 1042.34,1093.66 1231.34,1093.66 1381.34,943.66 v1(1475,943.66)
  Bottom Layer w10: U4.13 1470.79,695.79 1495,720 1495,930 1481.34,943.66 v1(1475,943.66)
SIM_CLK: C3.2 D3.2 J1.3 R18.1 | length 283.1
  Bottom Layer w8: R18.1 C3.2 596.89,1629.06 626.18,1599.76 J1.3
SIM_DATA: C2.2 D2.2 J1.7 R15.1 | length 225
  Bottom Layer w8: R15.1@461.18,1564.84 461.18,1504.84 526.18,1504.84 J1.7
SIM_GND: C12.2 J1.5 U2.10 | length 587.3
  Top Layer w25: v1(755,1126) 822.2,1058.8 U2.10
  Bottom Layer w25: C12.2@525.16,1212.06 C12.2@530.16,1212.06 ; C12.2 670.94,1210.06 v1(755,1126) ; 626.18,1214.06 J1.5
SIM_RST: C1.2 D1.2 J1.2 R16.1 | length 238.3
  Bottom Layer w8: C1.2@456.18,1434.84 571.84,1434.84 591.84,1454.84 J1.2 ; R16.1 C1.2
SIM_VDD: C7.2 C12.1 D5.2 J1.1 U2.14 | length 830.9
  Top Layer w20: v1(603.54,1130.56) 603.54,831.46 613.54,821.46 U2.14
  Bottom Layer w20: v1(603.54,1130.56) 499.64,1130.56 460.16,1170.04 C7.2 524,1270.06 556.04,1270.05 570.59,1284.61 570.59,1334.61 590.83,1354.84 J1.1
SWCLK: J7.4 U4.37 | length 584.4
  Top Layer w10: v1@965.59,247.61 965.59,219.41 975,210 1046.18,210 1061.18,195 J7.4 ; v1@965.59,392.61 v1(965.59,467.61)
  Bottom Layer w10: v1(965.59,467.61) 977.24,479.25 U4.37 ; v1(966,248) v1(966,392)
SWDIO: J7.2 U4.34 | length 608
  Top Layer w10: J7.2 861.18,124.18 905.59,168.59 v1(905.59,224.61)
  Bottom Layer w10: v1(905.59,224.61) 925,224.61 929.61,220 1040,220 1050,230 1050,339.02 1070.98,360 1155,360 1170.55,375.55 U4.34
TXD2_MCU: U4.30 U5.4 | length 873.6
  Bottom Layer w10: U5.4@630,90 685,90 720,125 1125,125 1155,155 1155,255 1175,275 1204.69,275 1249.29,319.61 U4.30
TXD3_MCU: J3.11 U4.21 | length 556.9
  Bottom Layer w10: U4.21 1663.31,538.31 1680,555 1680,690 1700,710 J3.11
TXD_MCU: Q3.3 R8.2 U4.12 | length 1553.6
  Top Layer w10: Q3.3 R8.2 505.61,1080 525.72,1100.11 525.72,1167 546.72,1188 998.66,1188 1058,1128.66 1251.34,1128.66 1405,975 v1(1450,975)
  Bottom Layer w10: U4.12 1444.84,754.84 1460,770 1460,915 1445,930 1445,970 v1(1450,975)
VBAT: J2.7 U4.1 | length 1208.2
  Bottom Layer w10: J2.7 82,910 132,960 220,960 240,940 550,940 590,900 590,855 615,830 990,830 1065.16,754.84 U4.1
VCC_5V: F1.1 J3.1 J3.2
VDD_EXT: C15.1 R10.1 R11.1 R12.1 R13.1 R29.1 U2.24 | length 1483.3
  Top Layer w20: v1(275,350) 275,633 290.32,648.32 R11.1 R10.1 ; v1(324,775) v1@329.16,769.84 ; R13.1@444.32,769.84 v1@466.84,769.84 ; v1@469,772 471.16,769.84 R12.1 ; R12.1@507.16,772 R12.1@509.32,769.84
  Top Layer w25: v1(540,210) 540,177.2 555.59,161.61 R29.1 ; 570.59,139.61 715.59,139.61 735.59,159.61 U2.24
  Bottom Layer w20: v1(324,775) v1@466,775
  Bottom Layer w25: v1@276,350 465,350 540,275 v1(540,210)
  other v1: 469,775
pads on no net: J1.0 J1.6 J2.18 K1.1 K1.2 U2.1 U2.2 U2.3 U2.4 U2.5 U2.6 U2.8 U2.9 U2.15 U2.19 U2.20 U2.21 U2.22 U2.23 U2.25 U2.26 U2.28 U2.29 U2.30 U2.31 U2.32 U2.33 U2.44
copper on no net:
  other v1: 0,0 0,0

## Polygon pours and split planes (outlines as drawn)
GND on Top Layer "Top Layer-No Net 4" (solid, remove dead copper, pour order 1001): -130,1860 -130,0 -25,-105 2015,-105 2130,10 2130,1730 1965,1895 -95,1895 -125,1865
GND on Top Layer "Top Layer-No Net" (solid, remove dead copper, pour order 1000): 1152.12,360.98 1152.12,166.17 1203.59,114.7 1227.12,91.17 1227.12,55.98 1237.12,45.98 1267.12,45.98 1662.12,45.98 1672.12,55.98 1662.12,65.98 1662.12,155.98 1662.12,230.98 1652.12,240.98 1292.12,240.98 1287.12,245.98 1267.12,265.98 1267.12,300.98 1267.12,320.98 1257.12,330.98 1247.12,340.98 1247.12,345.98 1247.12,360.98 1242.12,365.98 1227.12,380.98 1217.12,380.98 1202.12,380.98 1192.12,370.98 1157.12,370.98
+5V on Top Layer "Top Layer-No Net 2" (solid, remove dead copper, pour order 1000): 1496,1462 1510,1462 1516,1468 1624,1468 1644,1448 1644,1348 1637,1341 1603,1341 1585,1359 1527,1417 1512,1417
+4V on Top Layer "Top Layer-No Net 3" (solid, remove dead copper, pour order 1000): 1401,1596 1316,1596 1288,1568 1275,1555 1275,1406 1275,1142 1349,1068 1413,1004 1474,1004 1505,973 1505,940 1455,890 1451,890 1451,826 1390,765 1241,765 1235,759 1235,701 1242,694 1685,694 1721,730 1721,1051 1697,1075 1424,1075 1409,1090 1405,1094 1405,1121 1405,1293 1361,1337 1350,1348 1350,1383 1350,1531 1374,1555 1417,1555 1419,1557
GND on Bottom Layer "Bottom Layer-No Net 2" (solid, remove dead copper, pour order 1003): -85,1830 -85,0 -10,-75 2010,-75 2075,-10 2075,1770 1995,1850 -65,1850 -85,1830
GND on Bottom Layer "Bottom Layer-No Net 1" (solid, remove dead copper, pour order 1002): 1364,228 1770,228 1803,195 1746,138 1746,57 1457,57 1417,97
+5V on Bottom Layer "Bottom Layer-No Net" (solid, remove dead copper, pour order 1002): 1492,1449 1497,1449 1516,1468 1621,1468 1627,1462 1643,1446 1643,1398 1643,1314 1627,1298 1618,1298 1599,1317 1560,1356 1560,1382 1527,1415 1509,1415 1501,1415 1489,1427
VCC_5V on Bottom Layer "Top Layer-No Net 1" (solid, remove dead copper, pour order 1001): 1784,1220 1784,1291 1836,1343 1875,1343 1884,1334 1884,1339 1888,1343 1888,1340 1937,1291 1946,1282 1946,1196 1922,1172 1913,1172 1794,1172 1784,1182

## Keep-outs
Keep-Out Layer:
  circle w6: c78.74,78.74 r47.24
  circle w6: c1889.76,1692.91 r47.24
  circle w6: c1889.76,78.74 r47.24
  circle w6: c78.74,1692.91 r47.24
  lines w8: 0,78.74 ccw(c78.74,78.74) 78.74,0 1889.76,0 ccw(c1889.76,78.74) 1968.5,78.74 1968.5,1692.91 ccw(c1889.76,1692.91) 1889.76,1771.65 78.74,1771.65 ccw(c78.74,1692.91) 0,1692.91 0,78.74

## Other copper
Top Layer:
  rectangle net GND: 1505,230 1629.8,248.36

## Silkscreen, mask and mechanical layers (free items; w line width, h text height)
Top Overlay:
  text "DIO" at 850,225 h35 r270
  text "GND" at 945,225 h35 r270
  text "CLK" at 1040,225 h35 r270
  text "RST" at 1145,225 h35 r270
  text "3V3" at 717,133 h32
Bottom Overlay:
  text "5V" at 1749,1191 h35
  text "3V3" at 310,1190 h35
  text "3V3" at 415,1190 h35
  text "5V" at 1645,1190 h35
  text "GND" at 1749,1091 h35
  text "GND" at 310,1090 h35
  text "GND" at 445,1090 h35
  text "GND" at 1620,1090 h35
  text "PA1" at 1749,991 h35
  text "485B" at 345,990 h35
  text "485A" at 495,990 h35
  text "PA4" at 1620,990 h35
  text "PA6" at 1619,891 h35
  text "PA5" at 1749,891 h35
  text "VBAT" at 345,890 h35
  text "PB7" at 465,890 h35
  text "PB6" at 320,795 h35
  text "PB5" at 465,795 h35
  text "PB0" at 1619,791 h35
  text "PA7" at 1749,791 h35
  text "PB1" at 1749,691 h35
  text "TXD" at 1620,690 h35
  text "PB4" at 320,685 h35
  text "PB3" at 465,685 h35
  text "PB12" at 1749,591 h35
  text "PA15" at 340,590 h35
  text "PF7" at 465,590 h35
  text "RXD" at 1605,585 h35
  text "PB13" at 1605,520 h35
  text "PB14" at 1749,491 h35
  text "PF6" at 315,490 h35
  text "PA12" at 465,490 h35
  text "PA11" at 330,395 h35
  text "NC" at 442,393 h35
  text "PA8" at 1749,389 h35
  text "GND" at 310,343 h35
  text "GND" at 420,343 h35
  text "PB15" at 1665,336 h35
  text "2GModule_V2.0.1" at 1756,172 h70
Mechanical 1:
  circle w6: c78.74,78.74 r47.24
  circle w6: c1889.76,1692.91 r47.24
  circle w6: c78.74,1692.91 r47.24
  circle w6: c1889.76,78.74 r47.24
  lines w8: 0,78.74 ccw(c78.74,78.74) 78.74,0 1889.76,0 ccw(c1889.76,78.74) 1968.5,78.74 1968.5,1692.91 ccw(c1889.76,1692.91) 1889.76,1771.65 78.74,1771.65 ccw(c78.74,1692.91) 0,1692.91 0,78.74

## Text inside footprints (layer, text, board x,y; h text height)
U1: Top Overlay "1" at 1366.46,1337.36 h30 r90